# Altium PCB christmas_tree_second.PcbDoc
Units mm, origin at the board's own origin, x right, y up, seen from the top; angles counter-clockwise.
Board outline 59.9 x 59.87 mm, 2 copper layers (Top Layer, Bottom Layer); 8 components, 1 nets, 16 pads, 0 vias.
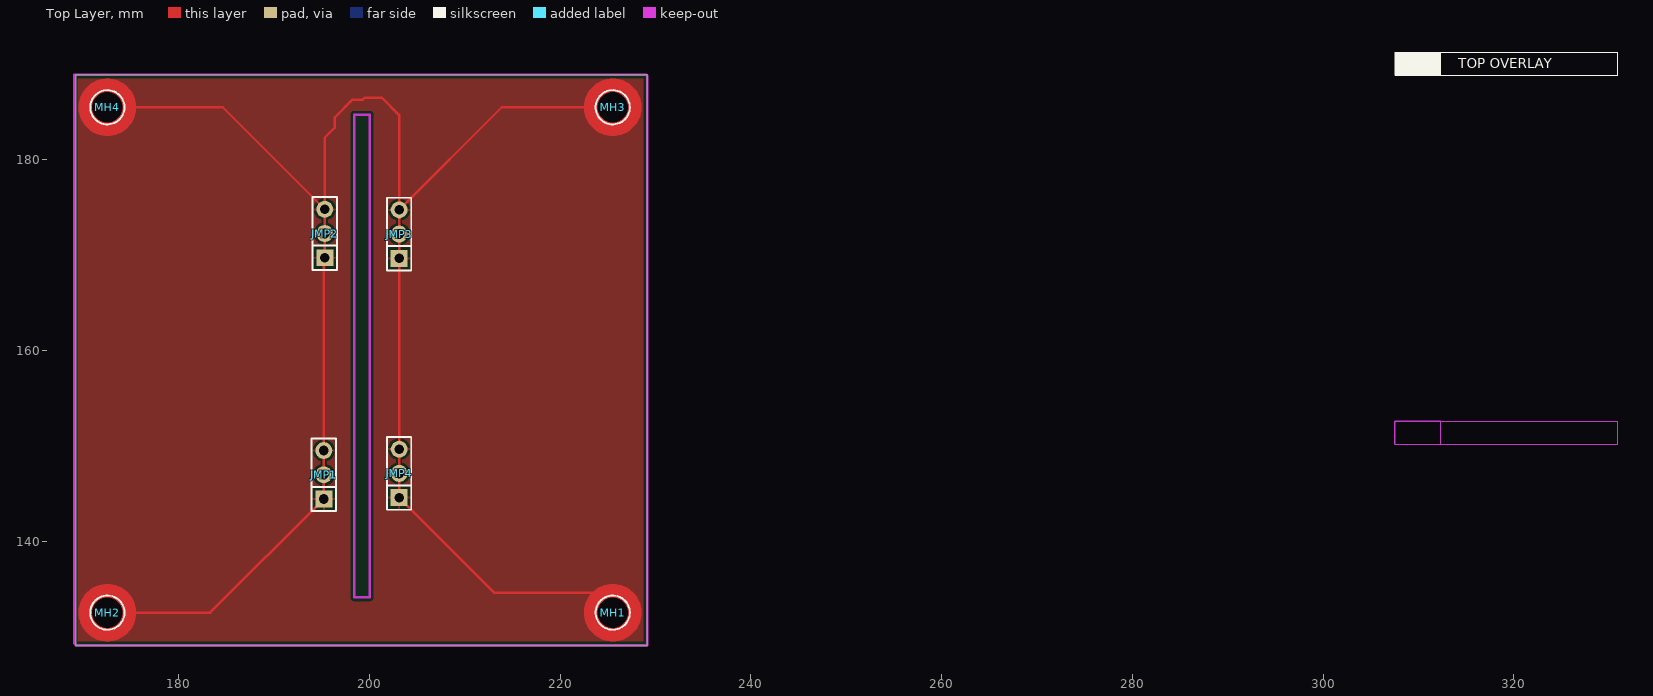
[diagram p0: Top Layer view]
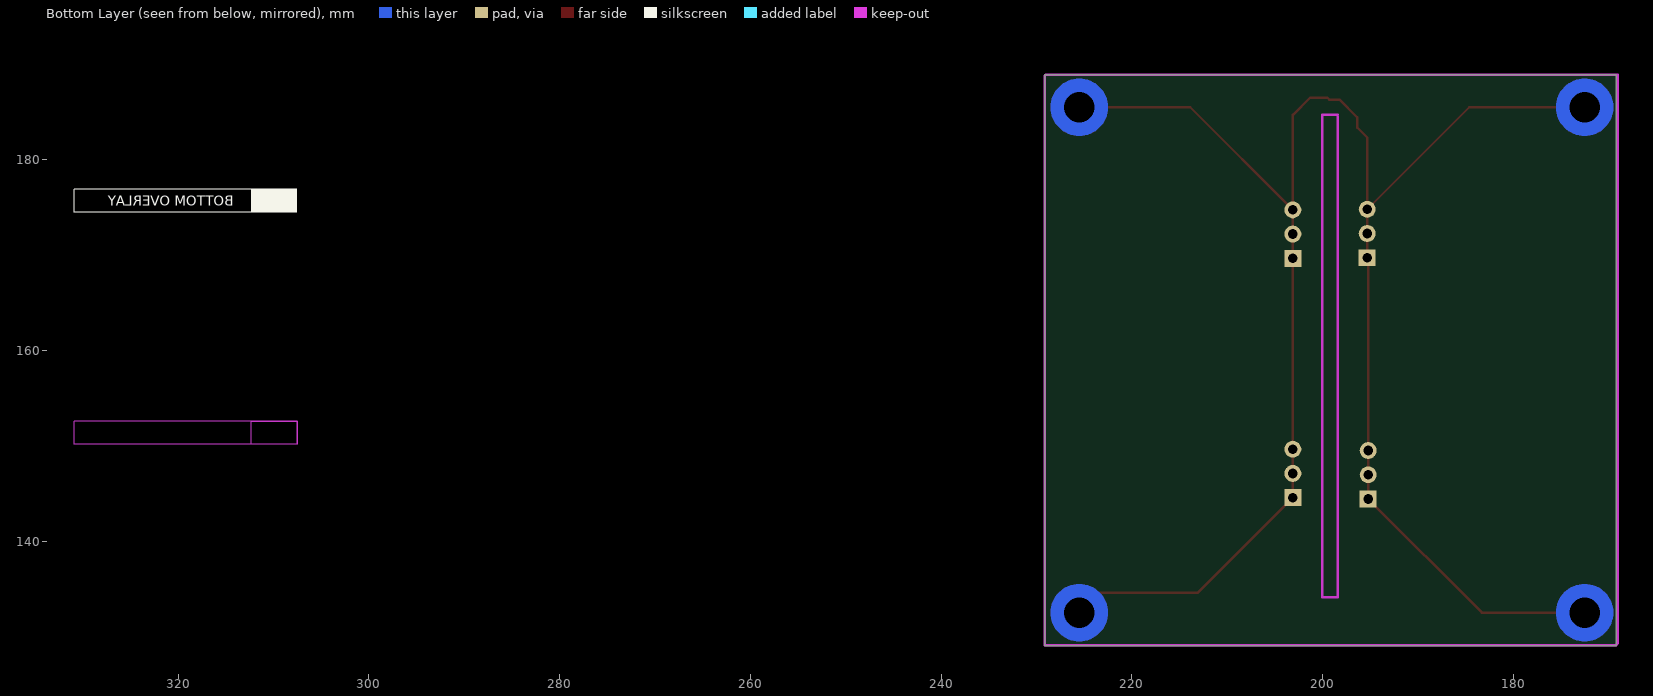
[diagram p1: Bottom Layer view, seen from below]

## Layer stack, top to bottom
Top Solder: solder mask 0.0102, Solder Resist, Dk 3.5
Top Layer: signal copper 0.0356
Dielectric 1: dielectric 0.32, FR-4, Dk 4.8
Bottom Layer: signal copper 0.0356
Bottom Solder: solder mask 0.0102, Solder Resist, Dk 3.5

## Board outline
169.2,129.032 229.1,129.032 229.1,188.9 169.2,188.9

## Design rules (kind name [scope] priority, off if disabled: settings)
Clearance [All] p1: gap=0.254
PolygonConnect [All] p1: connectstyle=Relief reliefconductorwidth=0.254 reliefentries=4 polygonreliefangle="90 Angle" airgapwidth=0.254
RoutingVias [All] p1: holewidth=0.711 width=1.27 viastyle="Through Hole" minholewidth=0.711 minwidth=1.27 maxholewidth=0.711 maxwidth=1.27
SolderMaskExpansion [All] p1: expansion=0.102
Width [All] p1: maxlimit=0.254 minlimit=0.254 preferedwidth=0.254
30 further rules are at their usual default settings.

## Components (designator, comment, footprint, x,y, rotation, side; value= is the part's Value field where it differs from the comment)
JMP1 "JUMPER" CON-HDR_3X1X254 195.2,144.42 r0 top
JMP2 "JUMPER" CON-HDR_3X1X254 195.3,169.72 r0 top
JMP3 "JUMPER" CON-HDR_3X1X254 203.1,169.66 r0 top
JMP4 "JUMPER" CON-HDR_3X1X254 203.1,144.56 r0 top
MH1 "MOUNT-PAD-ROUND_3.2" HOLE-3-2MM 225.5,132.5 r0 top
MH2 "MOUNT-PAD-ROUND_3.2" HOLE-3-2MM 172.5,132.5 r0 top
MH3 "MOUNT-PAD-ROUND_3.2" HOLE-3-2MM 225.5,185.5 r0 top
MH4 "MOUNT-PAD-ROUND_3.2" HOLE-3-2MM 172.5,185.5 r0 top

## Footprints (in the part's own frame and the unit in brackets; to place one, negate y for a bottom-side part, rotate by r counter-clockwise, add the part's x,y. Pads: shape width x height; smd on the part's side, far side on the other; paste and mask are expansions set on the pad)
CON-HDR_3X1X254 [mil]
  rect 70x70 / inner round 70 / far side rect 70x70 hole 40: 1(0,0)
  round 70 hole 40: 2(0,100) 3(0,200)
  silkscreen extent -50,-50 50,250
HOLE-3-2MM [mm]
  round 0 hole 3.2 paste-3.2: 1(0,0)
  Top Layer region: 3,0 2.772,1.148 2.121,2.121 1.148,2.772 0,3 0,3 -1.148,2.772 -2.121,2.121 -2.772,1.148 -3,0 -3,0 -2.772,-1.148 -2.121,-2.121 -1.148,-2.772 0,-3 0,-3 1.148,-2.772 2.121,-2.121 2.772,-1.148 3,0
  Multi-Layer region: 3.001,0 2.773,1.148 2.122,2.122 1.149,2.772 0.001,3 0.001,3 -1.147,2.772 -2.12,2.122 -2.771,1.148 -2.999,0 -2.999,0 -2.771,-1.148 -2.12,-2.121 -1.147,-2.771 0.001,-3 0.001,-3 1.149,-2.771 2.122,-2.121 2.773,-1.148 3.001,0
  silkscreen extent -1.79,-1.8 1.8,1.8

## Part data
JMP1 JMP2 JMP3 JMP4: library part CON-HDR_3X1X254
MH1 MH2 MH3 MH4: library part MISC-MH_3.2, "MOUNT-PAD-ROUND3.2"

## Nets (pads, with @x,y where several pads share a name; then routed paths per layer and width w, separated by ;. In a path a pad name is that pad's centre, name@x,y a point inside that pad or via, vN(x,y) a via of type N, cw(c..) or ccw(c..) an arc to the next point about the centre after c; other vN are vias at no path point)
GND: JMP1.1 JMP1.2 JMP1.3 JMP2.1 JMP2.2 JMP2.3 JMP3.1 JMP3.2 JMP3.3 JMP4.1 JMP4.2 JMP4.3 MH1.1 MH2.1 MH3.1 MH4.1 | length 195.8
  Top Layer w0.254: MH2.1 183.28,132.5 JMP1.1 JMP1.2 JMP1.3 195.2,169.62 JMP2.1 JMP2.2 JMP2.3 ; MH4.1 184.6,185.5 JMP2.3 ; 224.1,134.6 213.06,134.6 JMP4.1 JMP4.2 JMP4.3 JMP3.1 JMP3.2 JMP3.3 ; MH3.1 213.86,185.5 JMP3.3 ; JMP2.3 195.3,182.32 196.345,183.365 196.345,184.445 198.2,186.3 199.28,186.3 199.48,186.5 201.3,186.5 203.1,184.7 JMP3.3

## Polygon pours and split planes (outlines as drawn)
GND on Top Layer "GND_L01_P000" (solid, remove dead copper, pour order 0): 169,188.9 229,188.9 229.1,188.8 229.1,129.1 169.2,129.1 169,129.3

## Keep-outs
Keep-Out Layer:
  rectangle: 307.534,150.135 312.36,152.548
  lines w0.127: 307.534,150.135 330.902,150.135 330.902,152.548 307.534,152.548 307.534,150.135
  lines w0.256: 198.4,184.5 198.4,134.1 200,134.1 200,156.8 200,184.7 198.4,184.7 ; 169,129.3 169,188.9 ; 169,129.3 169.2,129.1 ; 169,129.3 169,188.9 ; 169,129.3 169.2,129.1 ; 169,188.9 229,188.9 ; 169,188.9 229,188.9 ; 169.2,129.1 229.1,129.1 ; 169.2,129.1 229.1,129.1 ; 229,188.9 229.1,188.8 ; 229,188.9 229.1,188.8 ; 229.1,129.1 229.1,188.8 ; 229.1,129.1 229.1,188.8
  text "CUT / WYCIAC" at 199.7,157.1 h1 r90
  text "ROUTING KEEPOUT LAYER" at 314.138,150.82 h0.89

## Silkscreen, mask and mechanical layers (free items; w line width, h text height)
Top Overlay:
  rectangle: 307.559,188.883 312.385,191.296
  lines w0.127: 307.559,188.883 307.559,191.296 330.927,191.296 330.927,188.883 307.559,188.883
  text "TOP OVERLAY" at 314.163,189.569 h1.02
Bottom Overlay:
  rectangle: 307.559,174.482 312.385,176.895
  lines w0.127: 307.559,174.482 307.559,176.895 330.927,176.895 330.927,174.482 307.559,174.482
  text "BOTTOM OVERLAY" at 314.163,175.167 h1.02
Top Paste:
  rectangle: 307.559,191.881 312.385,194.294
  lines w0.127: 307.559,191.881 330.927,191.881 330.927,194.294 307.559,194.294 307.559,191.881
  text "TOP PASTE" at 314.163,192.566 h1.02
Bottom Paste:
  rectangle: 307.559,171.484 312.385,173.897
  lines w0.127: 307.559,171.484 330.927,171.484 330.927,173.897 307.559,173.897 307.559,171.484
  text "BOTTOM PASTE" at 314.163,172.17 h1.02
Top Solder:
  rectangle: 307.559,185.886 312.385,188.299
  lines w0.127: 307.559,185.886 307.559,188.299 330.927,188.299 330.927,185.886 307.559,185.886
  text "TOP SOLDER MASK" at 314.163,186.572 h1.02
Bottom Solder:
  rectangle: 307.559,177.479 312.385,179.892
  lines w0.127: 307.559,177.479 330.927,177.479 330.927,179.892 307.559,179.892 307.559,177.479
  text "BOTTOM SOLDER MASK" at 314.163,178.165 h1.02
Drill Guide:
  rectangle: 307.559,168.487 312.385,170.9
  lines w0.127: 307.559,168.487 307.559,170.9 330.927,170.9 330.927,168.487 307.559,168.487
  text "DRILL GUIDE (SLOTS)" at 314.163,169.173 h1.02
Mechanical 1:
  rectangle: 307.559,162.493 312.385,164.906
  lines w0.127: 307.559,162.493 307.559,164.906 330.927,164.906 330.927,162.493 307.559,162.493
  text "BOARD OUTLINE" at 314.163,163.179 h1.02
Mechanical 3:
  rectangle: 307.509,159.398 312.335,161.811
  lines w0.127: 307.509,159.398 330.877,159.398 330.877,161.811 307.509,161.811 307.509,159.398
  lines w0.203: 575.109,78.334 598.604,78.334
  lines w0.254: 309.845,196.58 329.403,196.58 ; 305.019,142.3 305.019,202.168 333.721,202.168 333.721,142.3 305.019,142.3
  text ".Via_Count" at 489.165,411.486 h1.75
  text ".Track_Count" at 472.715,411.311 h1.7
  text "---" at 500.047,411.266 h1.75
  text "195.00MM" at 519.624,411.062 h1.75
  text "196.00MM" at 538.524,411.062 h1.75
  text "DS" at 517.603,390.839 h1.75
  text "X" at 513.767,390.789 h1.75
  text "FEED THRU'" at 499.422,376.857 h1.75
  text "TENTED" at 523.623,376.857 h1.75
  text "X" at 519.127,376.806 h1.75
  text "X" at 494.595,376.768 h1.75
  text "UNIQUE DRILL" at 499.422,371.853 h1.75
  text "X" at 494.591,371.751 h1.75
  text "X" at 561.317,367.357 h1.75
  text "AS SHOWN" at 565.127,367.357 h1.75
  text "X" at 534.139,362.404 h1.75
  text "CAD" at 538.127,362.379 h1.75
  text "DRILL DRAWING" at 479.083,260.974 h1.75
  text "APERTURE TABLES\FILES ARE EMBEDDED" at 519.951,260.974 h1.75
  text "1" at 590.712,260.918 h1.75
  text "FR4-01" at 585.899,253.746 h1.75
  text "X" at 581.072,253.67 h1.75
  text "1.501mm" at 525.63,248.997 h1.75
  text "X" at 520.803,248.92 h1.75
  text "X" at 502.81,244.548 h1.75
  text "IN A/W ANSI IPC-6012 TYPE 2 CLASS 2" at 507.621,244.514 h1.75
  text "X" at 502.77,240.043 h1.75
  text "IN A/W ANSI IPC-6012 TYPE 2 CLASS 2" at 507.621,240.018 h1.75
  text "35um (1oz)" at 538.127,230.963 h1.75
  text "X" at 533.3,230.886 h1.75
  text "AS SHOWN" at 566.625,212.535 h1.75
  text "X" at 561.698,212.51 h1.75
  text "X" at 502.897,205.042 h1.75
  text "COMPONENT SIDE" at 507.621,205.042 h1.75
  text "X" at 502.897,200.572 h1.75
  text "X" at 574.652,200.572 h1.75
  text "AS SHOWN" at 507.621,200.521 h1.75
  text "NC_ DRILL FILES" at 579.63,200.521 h1.75
  text "LAYER USAGE" at 309.845,197.291 h2.03
  text "20um" at 538.127,196 h1.75
  text "X" at 533.25,195.974 h1.75
  text "AS SHOWN" at 553.125,186.919 h1.75
  text "X" at 548.299,186.903 h1.75
  text "X" at 548.388,176.975 h1.75
  text "X" at 574.906,176.975 h1.75
  text "COMPONENT" at 553.113,176.924 h1.75
  text "SOLDER" at 579.63,176.924 h1.75
  text "WHITE" at 507.621,172.428 h1.75
  text "X" at 502.713,172.356 h1.75
  text "SCREEN PRINT" at 553.113,167.45 h1.75
  text "X" at 548.286,167.336 h1.75
  text "GLOSS" at 507.621,162.891 h1.75
  text "GREEN" at 553.113,162.891 h1.75
  text "X" at 502.794,162.814 h1.75
  text "X" at 548.378,162.689 h1.75
  text "TECHNICAL DATA" at 314.113,160.084 h1.02
  text "X" at 502.77,129.985 h1.75
  text "CUT AND TRIM ACCORDING TO LAYER MECHANICAL 1 (BOARD OUTLINE)" at 507.621,129.934 h1.75
  text "N.C. ROUTE" at 532.132,116.409 h1.75
  text "X" at 527.305,116.392 h1.75
  text "X" at 502.808,104.585 h1.75
  text "IN A/W ANSI IPC-A-600F" at 507.609,104.433 h1.75
  text "2" at 560.644,104.433 h1.75
  text "X" at 556.81,104.298 h1.75
  text "UL CERTIFICATION" at 507.609,99.873 h1.75
  text "X" at 502.808,99.785 h1.75
  text "NONE" at 507.609,87.923 h1.75
  text "X" at 502.752,87.772 h1.75
  text "2" at 590.603,83.401 h1.75
  text "X" at 585.776,83.287 h1.75
  text "PER ORDER" at 578.613,79.042 h1.75
  text "OTHER" at 567.108,78.842 h1.75
  text "X" at 562.352,78.633 h1.75
  text "PER ORDER" at 567.108,74.346 h1.75
  text "X" at 562.29,74.111 h1.75
  text "2 SIDES" at 550.108,69.863 h1.75
  text "0.50MM" at 584.803,69.801 h1.75
  text "X" at 545.187,69.631 h1.75
  text "LEGEND" at 550.115,65.393 h1.75
  text "X" at 545.289,65.278 h1.75
  text "X" at 523.852,60.872 h1.75
  text "IS09001/AS3901" at 528.602,60.872 h1.75
  text "X" at 516.197,55.919 h1.75
  text "PER ORDER" at 521.201,55.893 h1.75
Mechanical 6:
  drawing of 617 lines, arcs and shapes, not listed
  text "DESIGN INFORMATION" at 473.128,418.322 h2.01
  text "(REFER ALSO PROFILING INFORMATION)" at 537.06,414.538 h1.75
  text "BOARD TECHNOLOGY" at 473.128,414.309 h1.91
  text "BOARD SIZE" at 519.635,414.309 h1.91
  text "X" at 535.357,410.867 h1.75
  text "(MIN. TRACK / PADS / CLEARANCE" at 473.179,406.537 h1.75
  text "IN 0.001\" )" at 518.162,406.537 h1.75
  text "EXTERNAL" at 525.3,403.489 h1.75
  text "PER IPC-D-275 CLASS 2" at 539.32,403.489 h1.75
  text "LEVEL C AND IS THE" at 573.052,403.489 h1.75
  text "MINIMUM ANNULAR RING 0.05MM" at 473.179,403.463 h1.75
  text "(0.002\")" at 513.666,403.463 h1.75
  text "MANUFACTURING REGISTRATION" at 473.306,400.491 h1.75
  text "ALLOWANCE" at 512.803,400.491 h1.75
  text "CIRCUIT TYPE:" at 473.128,390.839 h1.91
  text "SS" at 498.531,390.839 h1.75
  text "PTH MULTILAYER" at 538.101,390.839 h1.75
  text "Number of Layers :" at 565.127,390.839 h1.75
  text "FINGER CONNECTOR DIM PER:" at 473.128,386.344 h1.91
  text "AS SHOWN" at 565.127,386.344 h1.75
  text "BUILD STATISTICS" at 65.714,385.806 h1.52
  text "BUILD STATISTICS" at 65.714,385.806 h1.52
  text "No. OFF TOTAL" at 499.138,382.33 h1.75
  text "GENERAL" at 65.511,382.097 h1.02
  text "GENERAL" at 65.511,382.097 h1.02
  text "BOTH SIDES" at 565.127,381.861 h1.75
  text "ONE SIDE" at 538.127,381.822 h1.75
  text ".Net_Count" at 75.188,379.989 h1.02
  text ".Net_Count" at 75.188,379.989 h1.02
  text "NETS" at 65.587,379.938 h0.89
  text "NETS" at 65.587,379.938 h0.89
  text ".Component_Count" at 75.188,377.906 h1.02
  text ".Component_Count" at 75.188,377.906 h1.02
  text "COMPONENTS" at 65.613,377.881 h0.89
  text "COMPONENTS" at 65.613,377.881 h0.89
  text "VIAS:" at 473.128,376.819 h1.91
  text "BURIED LAYER SEQUENCE" at 547.626,376.819 h1.75
  text "NONE" at 485.71,376.793 h1.75
  text "PRIMITIVES" at 65.536,374.401 h1.02
  text "PRIMITIVES" at 65.536,374.401 h1.02
  text ".Fill_Count" at 75.188,372.268 h1.02
  text ".Fill_Count" at 75.188,372.268 h1.02
  text "FILLS" at 65.613,372.242 h0.89
  text "FILLS" at 65.613,372.242 h0.89
  text "2 SIZES" at 523.623,371.815 h1.75
  text "BLIND LAYER SEQUENCE" at 547.626,371.815 h1.75
  text ".Track_Count" at 75.188,370.21 h1.02
  text ".Track_Count" at 75.188,370.21 h1.02
  text "TRACKS" at 65.613,370.159 h0.89
  text "TRACKS" at 65.613,370.159 h0.89
  text ".String_Count" at 75.188,368.127 h1.02
  text ".String_Count" at 75.188,368.127 h1.02
  text "STRINGS" at 65.613,368.077 h0.89
  text "STRINGS" at 65.613,368.077 h0.89
  text "LAYER CONSTRUCTION PER:" at 473.128,367.319 h1.91
  text "LAMINATION SEQUENCE" at 519.127,367.319 h1.75
  text ".Arc_Count" at 75.188,366.019 h1.02
  text ".Arc_Count" at 75.188,366.019 h1.02
  text "ARC'S" at 65.613,365.968 h0.89
  text "ARC'S" at 65.613,365.968 h0.89
  text "NB2.05" at 561.913,363.062 h1.78
  text "LANDS" at 65.511,362.946 h1.02
  text "LANDS" at 65.511,362.946 h1.02
  text "FILE NAME:" at 548.016,362.765 h1.75
  text "ARTWORK:" at 473.128,362.341 h1.91
  text "MANUAL" at 498.523,362.341 h1.75
  text "DIGITISED" at 517.629,362.341 h1.75
  text ".Pad_Count" at 75.188,360.812 h1.02
  text ".Pad_Count" at 75.188,360.812 h1.02
  text "PADS" at 65.613,360.761 h0.89
  text "PADS" at 65.613,360.761 h0.89
  text "GERBER SET" at 561.913,360.162 h1.75
  text "FILE TYPE:" at 548.016,360.098 h1.75
  text ".Via_Count" at 75.188,358.729 h1.02
  text ".Via_Count" at 75.188,358.729 h1.02
  text "VIA'S" at 65.638,358.704 h0.89
  text "VIA'S" at 65.638,358.704 h0.89
  text "SUPPLIED ARTWORK/PATTERN MASTER LIST" at 473.128,356.041 h2.01
  text "PRINT SCALE" at 65.435,354.894 h1.02
  text "PRINT SCALE" at 65.435,354.894 h1.02
  text ".Print_Scale" at 75.138,352.735 h1.02
  text ".Print_Scale" at 75.138,352.735 h1.02
  text "SCALE" at 65.562,352.71 h0.89
  text "SCALE" at 65.562,352.71 h0.89
  text "DRAWING No./CAD FILE REF." at 520.194,352.231 h1.75
  text "REVISION" at 586.391,352.092 h1.75
  text "DESCRIPTION" at 478.64,352.054 h1.75
  text "BUILD CONFIGURATION AND SPECIFICATIONS SUMMARY" at 356.618,328.286 h2.03
  text "2 Layer Build" at 358.622,323.981 h1.52
  text "Silk-Screened White Legend" at 403.478,323.981 h1.52
  text "DO NOT TRIM Legend (Silkscreen)" at 403.478,321.187 h1.52
  text "Gloss Blue Solder Mask" at 358.465,321.136 h1.52
  text "1 Oz Copper Clad" at 358.64,318.436 h1.52
  text "BOARD OUTLINE Layer Denotes Board Cutout" at 403.465,318.161 h1.52
  text "LAYER STACK CONFIGURATION" at 379.829,282.307 h2.03
  text "2 LAYER BUILD" at 390.795,275.144 h2.03
  text "TOP LAYER" at 368.533,263.061 h0.76
  text "TL" at 381.264,262.972 h0.76
  text "-  COPPER CLAD" at 407.801,262.917 h0.76
  text "-  CORE" at 408.455,261.575 h0.76
  text "BOTTOM LAYER" at 368.556,260 h0.76
  text "BL" at 381.255,260 h0.76
  text "RO-3010" at 496.803,253.839 h1.75
  text "POLYIMIDE" at 549.081,253.82 h1.75
  text "FR4-04" at 514.932,253.746 h1.75
  text "FR4-08" at 532.432,253.746 h1.75
  text "ARLON" at 567.916,253.746 h1.75
  text "MATERIAL:" at 473.163,253.566 h1.91
  text "THICKNESS:" at 485.625,248.997 h1.75
  text "~0.8mm" at 507.621,248.997 h1.75
  text "2.2mm" at 560.631,248.997 h1.75
  text "3.2mm" at 578.614,248.997 h1.75
  text "TOLERANCE:" at 484.634,244.475 h1.75
  text "OTHER +/-" at 566.625,244.475 h1.75
  text "BOW & TWIST:" at 481.637,239.98 h1.75
  text "AS SHOWN" at 566.625,239.98 h1.75
  text "TOTAL BOARD THICKNESS: APPROX" at 377.421,236.404 h0.76
  text "1.5mm" at 398.604,236.404 h0.76
  text "COPPER THICKNESS (FINISHED)" at 477.624,235.458 h1.75
  text "18um (1/2oz)" at 507.621,231.001 h1.75
  text "OUTER:" at 490.629,230.963 h1.75
  text "70um (2oz)" at 566.625,230.963 h1.75
  text "18um (1/2oz)" at 507.621,226.505 h1.75
  text "INNER SIGNAL:" at 482.12,226.467 h1.75
  text "35um (1oz)" at 538.127,226.467 h1.75
  text "70um (2oz)" at 566.625,226.467 h1.75
  text "18um (1/2oz)" at 507.621,222.035 h1.75
  text "INNER PWR:" at 485.117,221.996 h1.75
  text "35um (1oz)" at 538.127,221.996 h1.75
  text "70um (2oz)" at 566.625,221.996 h1.75
  text "STRUCTURE:" at 473.636,216.993 h1.91
  text "REFER" at 507.625,216.993 h1.75
  text "AS PER DRAWING No." at 507.621,212.497 h1.75
  text "DRILLING:" at 473.636,208.484 h1.91
  text "VIEWED FROM:" at 482.12,205.004 h1.75
  text "SOLDER SIDE" at 538.127,205.004 h1.75
  text "REFERENCE:" at 484.634,200.483 h1.75
  text "PATTERN MASTER LIST" at 538.127,200.483 h1.75
  text "PTH MINIMUM COPPER THICKNESS:" at 488.114,195.961 h1.75
  text "OTHER" at 566.625,195.961 h1.75
  text "NPTH:" at 491.619,191.44 h1.75
  text "TENTED" at 507.621,191.44 h1.75
  text "PADS REMOVED" at 538.127,191.44 h1.75
  text "REMOVE PADS" at 566.625,191.44 h1.75
  text "NONE" at 579.525,186.957 h1.75
  text "2nd DRILL" at 507.621,186.919 h1.75
  text "BOTH" at 538.127,186.919 h1.75
  text "ETCHING" at 507.621,181.445 h1.75
  text "BOARD FINISH:" at 473.636,181.407 h1.91
  text "REFER PATTERN MASTER LIST" at 538.127,181.407 h1.75
  text "LEGEND / SCREEN PRINT:" at 488.114,176.886 h1.75
  text "NONE" at 530.634,176.886 h1.75
  text "COLOUR:" at 488.114,172.39 h1.75
  text "YELLOW" at 538.127,172.39 h1.75
  text "OTHER" at 566.625,172.39 h1.75
  text "SOLDER RESIST:" at 480.138,167.412 h1.75
  text "LIQUID PHOTOIMAGEABLE" at 507.621,167.412 h1.75
  text "MATTE" at 522.581,162.925 h1.75
  text "BLACK" at 578.969,162.925 h1.75
  text "COLOUR:" at 488.114,162.891 h1.75
  text "G/Y" at 566.625,162.891 h1.75
  text "BLUE" at 538.006,162.81 h1.75
  text "TRACK FINISH:" at 473.636,157.912 h1.91
  text "SELECTIVE SOLDER" at 507.621,157.912 h1.75
  text "REFLOW SOLDER" at 547.118,157.912 h1.75
  text "MANUFACTURE DATA" at 314.113,157.087 h1.02
  text "HASL (HOT AIR SOLDER LEVEL)" at 507.629,153.169 h1.75
  text "REFER PATTERN MASTER LIST" at 507.621,148.946 h1.75
  text "OTHER" at 552.929,148.946 h1.75
  text "3um IMMERSION GOLD SMOBC (SOLDER MASK OVER BARE COPPER)" at 507.621,143.955 h1.75
  text "HARD GOLD PLATE FINISH" at 507.621,139.421 h1.75
  text "OTHER" at 547.118,139.421 h1.75
  text "AS SHOWN" at 507.621,134.925 h1.75
  text "REFER" at 547.118,134.925 h1.75
  text "PROFILING:" at 473.636,129.896 h1.91
  text "REFER PCB BLANK DWG No." at 507.621,125.426 h1.75
  text "USE PROFILE/ ROUTE TAPE SUPPLIED" at 507.621,120.93 h1.75
  text "(REFER PATTERN MASTER LIST)" at 554.11,120.909 h1.75
  text "SQUARE CUT" at 507.621,116.447 h1.75
  text "V. SCORE" at 554.129,116.409 h1.75
  text "BLANK" at 574.626,116.409 h1.75
  text "ACCEPTABILITY:" at 473.128,111.405 h1.91
  text "MATERIALS AND WORKMANSHIP FOR" at 502.617,111.405 h1.75
  text "ALL PRINTED WIRING BOARDS TO MEE" at 547.626,111.405 h1.75
  text "T" at 593.118,111.379 h1.75
  text "OR EXCEED THE REQUIREMENTS OF:" at 502.135,108.408 h1.75
  text "1" at 552.643,104.394 h1.75
  text "3" at 569.635,104.394 h1.75
  text "AUSTEL" at 553.633,99.873 h1.75
  text "A" at 536.643,95.395 h1.75
  text "B" at 544.644,95.395 h1.75
  text "MIL-P-55110E GRP" at 507.609,95.377 h1.75
  text "AS2546" at 553.491,95.377 h1.75
  text "OTHER" at 573.633,95.377 h1.75
  text "ADDITIONAL REQUIREMENTS:" at 473.052,91.313 h1.91
  text "MICROSECTION:" at 479.63,87.884 h1.75
  text "SAMPLE PLAN" at 521.128,87.884 h1.75
  text "MIL-P-55110E SERIAL Nos. PER ORDER" at 547.13,87.884 h1.75
  text "MIL-P-55110E GRP" at 521.109,83.378 h1.75
  text "A" at 550.143,83.395 h1.75
  text "B" at 558.144,83.395 h1.75
  text "CERTIFICATION:" at 479.63,83.363 h1.75
  text "NONE" at 507.609,83.363 h1.75
  text "IPC CLASS:" at 562.104,83.363 h1.75
  text "1" at 581.637,83.363 h1.75
  text "3" at 598.629,83.363 h1.75
  text "QUALITY RELEASE REPORT" at 521.109,78.842 h1.75
  text "REQUIRED" at 546.991,74.384 h1.75
  text "ELECTRICAL TEST: Bare Board" at 479.63,74.346 h1.7
  text "NONE" at 521.109,74.346 h1.75
  text "MIN. PITCH" at 567.133,69.855 h1.75
  text "SURFACE MOUNT:" at 479.63,69.825 h1.75
  text "NONE" at 521.109,69.825 h1.75
  text "1 SIDE" at 535.433,69.771 h1.75
  text "MANUFACTURER'S ID/LOGO:" at 479.63,65.355 h1.75
  text "NONE" at 521.109,65.355 h1.75
  text "FOIL" at 536.103,65.355 h1.75
  text "REFER" at 567.133,65.355 h1.75
  text "NONE" at 562.155,60.833 h1.75
  text "MANUFACTURER'S ACCREDITATION:" at 479.63,60.325 h1.75
  text "PACKAGING AND HANDLING:" at 479.63,55.855 h1.75
  text "REFER" at 546.991,55.855 h1.75
Mechanical 7:
  rectangle: 307.559,146.954 312.385,149.367
  lines w0.127: 307.484,147.01 307.484,149.423 ; 307.509,147.01 330.877,147.01 330.877,149.423 307.509,149.423
  text "IDENTIFICATION DATA" at 314.163,147.64 h1.02
Mechanical 15:
  rectangle: 307.534,153.132 312.36,155.545
  lines w0.127: 307.534,153.132 330.902,153.132 330.902,155.545 307.534,155.545 307.534,153.132
  text "DIMENSIONS" at 314.138,153.818 h1.02
Mechanical 16:
  drawing of 643 lines, arcs and shapes, not listed
  text "1" at 72.14,423.023 h3
  text "2" at 144.124,423.023 h3
  text "3" at 216.133,423.023 h3
  text "4" at 285.119,423.023 h3
  text "5" at 357.128,423.023 h3
  text "6" at 427.131,423.023 h3
  text "7" at 499.14,423.023 h3
  text "8" at 573.13,423.023 h3
  text "PRODUCT FAMILY" at 44.725,418.16 h3
  text "Edge2 and Edge3" at 60.304,410.374 h3.05
  text "A" at 39.12,391.019 h3
  text "A" at 603.127,391.019 h3
  text "B" at 39.628,321.042 h3
  text "B" at 603.635,321.042 h3
  text "C" at 39.628,256.018 h3
  text "C" at 603.635,256.018 h3
  text "D" at 39.628,187.032 h3
  text "D" at 603.635,187.032 h3
  text "mm" at 33.151,177.024 h2.01 r90
  text "E" at 39.628,119.519 h3
  text "0" at 33.151,74.027 h2.01 r90
  text "DO NOT" at 23.652,60.032 h2.01
  text "SCALE" at 24.134,56.527 h2.01
  text "DIMENSIONS" at 20.629,51.523 h2.01
  text "F" at 39.628,50.532 h3
  text "F" at 603.635,50.532 h3
  text "SCALE:" at 576.18,48.91 h1.78
  text "BARTOSZ ZIOLEK" at 436.059,48.524 h1.78
  text "DESIGNER" at 413.344,48.469 h1.78
  text "DATE" at 476.164,48.351 h1.78
  text "IN" at 27.132,48.018 h2.01
  text ".Print_Scale" at 575.915,44.686 h2.54
  text "MILLIMETRES" at 20.147,44.03 h2.01
  text "DRAWN" at 413.299,43.449 h1.78
  text "DATE:" at 576.104,38.91 h1.78
  text "CHECKED" at 413.299,38.522 h1.78
  text "INDEX" at 493.133,38.415 h1.78
  text ".Print_Date" at 575.84,35.086 h2.54
  text "FIRST DESIGN CREATED," at 249.849,33.588 h1.78
  text "10.10.2016" at 397.24,33.586 h1.78
  text "BZ" at 382.869,33.537 h1.78
  text "A" at 237.378,33.486 h1.78
  text "Firmwave Ltd." at 444.873,33.487 h1.78
  text "CUSTOMER" at 413.25,33.258 h1.78
  text "Title:" at 493.207,33.155 h2.03
  text "SHEET" at 576.192,28.91 h1.78
  text "Christmas Tree Part 2" at 493.565,28.762 h2.29
  text "REVISION" at 233.593,28.482 h1.78
  text "DESCRIPTION OF TASK OR MODIFICATION" at 305.272,28.482 h1.78
  text "DATE" at 400.189,27.996 h1.78
  text "APPD" at 385.189,27.939 h1.78
  text "A2" at 596.34,25.911 h2
  text "1" at 575.943,24.784 h3.05
  text "OF" at 580.898,24.798 h2.03
  text "1" at 586.992,24.784 h3.05
  text ".Pcb_File_Name" at 291.813,23.709 h1.78
  text "A2_Firmwave" at 251.046,23.327 h1.78
  text "TEMPLATE:" at 233.593,23.275 h1.78
  text "1" at 72.14,18.02 h3
  text "2" at 144.124,18.02 h3
  text "3" at 216.133,18.02 h3
  text "4" at 285.119,18.02 h3
  text "5" at 357.128,18.02 h3
  text "6" at 427.131,18.02 h3
  text "7" at 499.14,18.02 h3
  text "8" at 573.13,18.02 h3
Drill Drawing:
  circle w0.254: c94.456,384.8 r0.847
  rectangle: 307.559,165.49 312.385,167.903
  lines w0.127: 307.559,165.49 330.927,165.49 330.927,167.903 307.559,167.903 307.559,165.49
  lines w0.254: 93.609,380.143 95.303,380.143 95.303,381.837 93.609,381.837 93.609,380.143
  lines w0.381: 92.09,379 416.815,379 ; 92.09,386.62 416.815,386.62 ; 106.083,375.19 106.083,390.43 ; 119.541,375.19 119.541,390.43 ; 148.743,375.19 148.743,390.43 ; 161.592,375.19 161.592,390.43 ; 180.231,375.19 180.231,390.43 ; 218.319,375.19 218.319,390.43 ; 233.301,375.19 233.301,390.43 ; 252.245,375.19 252.245,390.43 ; 269.766,375.19 269.766,390.43 ; 291.451,375.19 291.451,390.43 ; 325.325,375.19 325.325,390.43 ; 359.199,375.19 359.199,390.43 ; 381.189,375.19 381.189,390.43 ; 92.09,375.19 416.815,375.19 416.815,390.43 92.09,390.43 92.09,375.19
  text "Symbol" at 94.376,387.763 h1.83
  text "Count" at 107.226,387.763 h1.83
  text "Hole Size" at 120.684,387.763 h1.83
  text "Plated" at 149.886,387.763 h1.83
  text "Hole Type" at 162.735,387.763 h1.83
  text "Drill Layer Pair" at 181.374,387.763 h1.83
  text "Via/Pad" at 219.462,387.763 h1.83
  text "Pad Shape" at 234.444,387.763 h1.83
  text "Template" at 253.388,387.763 h1.83
  text "Description" at 270.909,387.763 h1.83
  text "Hole Tolerance (+)" at 292.594,387.763 h1.83
  text "Hole Tolerance (-)" at 326.468,387.763 h1.83
  text "Hole Length" at 360.342,387.763 h1.83
  text "Routed Path Length" at 382.332,387.763 h1.83
  text "4" at 107.226,383.953 h1.52
  text "3.200mm (125.98mil)" at 120.684,383.953 h1.52
  text "PTH" at 149.886,383.953 h1.52
  text "Round" at 162.735,383.953 h1.52
  text "Top Layer - Bottom Layer" at 181.374,383.953 h1.52
  text "Pad" at 219.462,383.953 h1.52
  text "Rounded" at 234.444,383.953 h1.52
  text "c0h320p320" at 253.388,383.953 h1.52
  text "-" at 360.342,383.953 h1.52
  text "-" at 382.332,383.953 h1.52
  text "12" at 107.226,380.143 h1.52
  text "1.016mm (40.00mil)" at 120.684,380.143 h1.52
  text "PTH" at 149.886,380.143 h1.52
  text "Round" at 162.735,380.143 h1.52
  text "Top Layer - Bottom Layer" at 181.374,380.143 h1.52
  text "Pad" at 219.462,380.143 h1.52
  text "Rounded" at 234.444,380.143 h1.52
  text "(Mixed)" at 253.388,380.143 h1.52
  text "-" at 360.342,380.143 h1.52
  text "-" at 382.332,380.143 h1.52
  text "16 Total" at 107.226,376.333 h1.52
  text "DRILL DRAWING" at 314.163,166.176 h1.02